# Altium PCB PCB1.PcbDoc
Units mil, origin at the board's own origin, x right, y up, seen from the top; angles counter-clockwise.
Board outline 3130 x 3175 mil, 2 copper layers (Top Layer, Bottom Layer); 30 components, 27 nets, 105 pads, 18 vias.
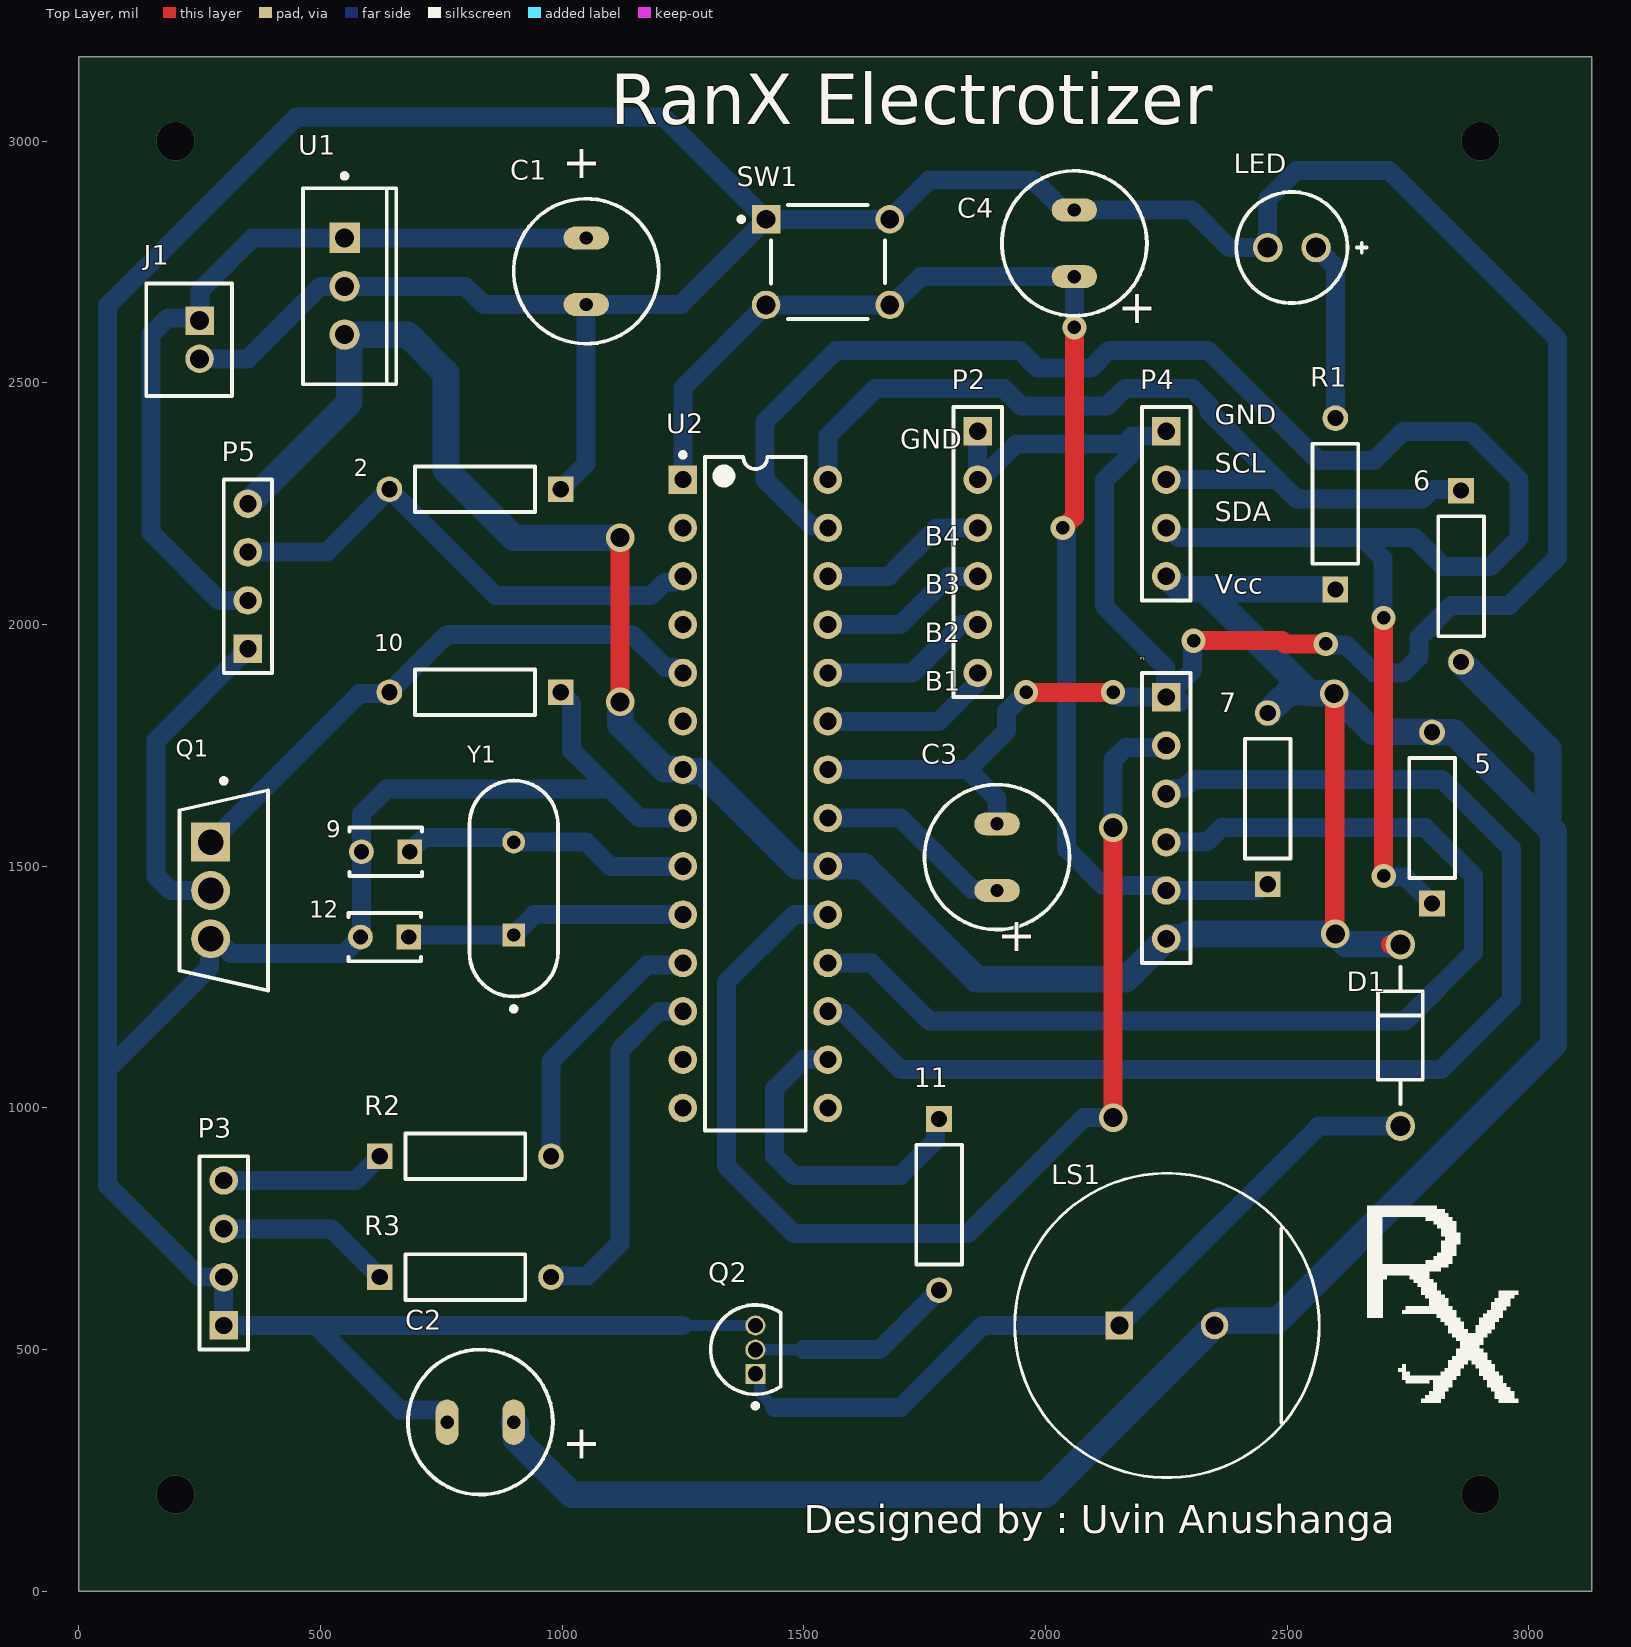
[diagram p0: Top Layer view]
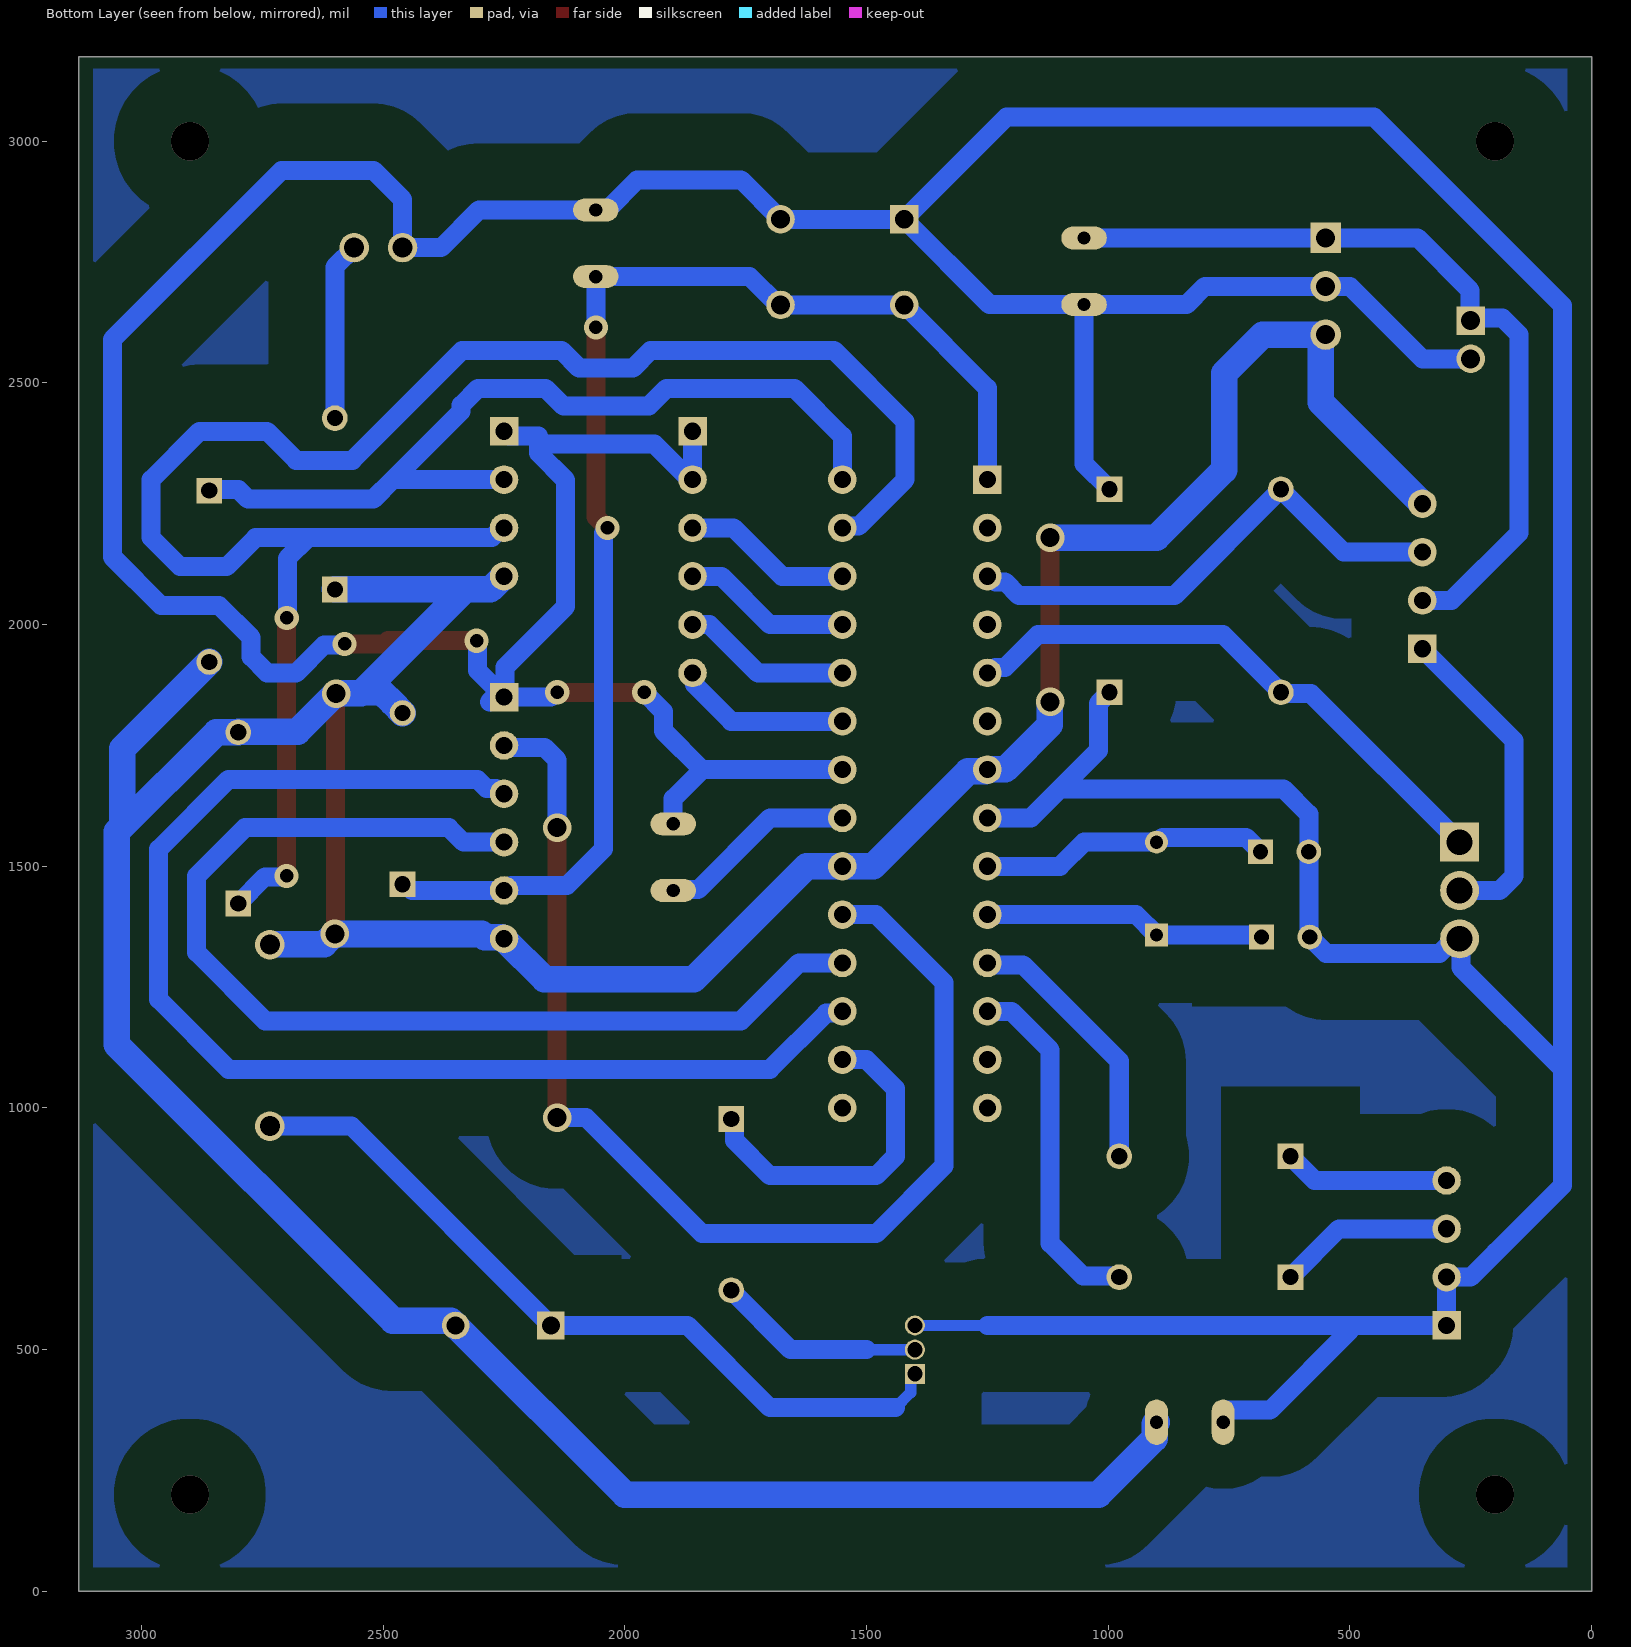
[diagram p1: Bottom Layer view, seen from below]

## Layer stack, top to bottom
Top Solder: solder mask 0.4, Solder Resist, Dk 3.5
Top Layer: signal copper 1.4
Dielectric 1: dielectric 12.6, FR-4, Dk 4.8
Bottom Layer: signal copper 1.4
Bottom Solder: solder mask 0.4, Solder Resist, Dk 3.5

## Board outline
0,0 3130,0 3130,3175 0,3175

## Design rules (kind name [scope] priority, off if disabled: settings)
Clearance [All] p1: gap=27.56 ignorepadtopadclearanceinfootprint=FALSE
PolygonConnect [All] p1: connectstyle=Relief reliefconductorwidth=10 reliefentries=4 polygonreliefangle="90 Angle" airgapwidth=10
RoutingVias [All] p1: holewidth=28 width=50 viastyle="Through Hole" minholewidth=28 minwidth=50 maxholewidth=28 maxwidth=50
SolderMaskExpansion [All] p1: expansion=4 istentingtop=FALSE
Width [All] p1: maxlimit=59.06 minlimit=31.5 preferedwidth=39.37
30 further rules are at their usual default settings.

## Components (designator, comment, footprint, x,y, rotation, side; value= is the part's Value field where it differs from the comment)
2 "220R" RESA60-630X240 820,2280 r180 top
5 "10K" RESA60-630X240 2800,1600 r90 top
6 "10K" RESA60-630X240 2860,2100 r270 top
7 "10k" RESA60-630X240 2460,1640 r90 top
9 "22pF" KEMT-C315-THT-2 635,1530 r180 top
10 "1k" RESA60-630X240 820,1860 r180 top
11 "220R" RESA60-630X240 1780,800 r270 top
12 "22pF" KEMT-C315-THT-2 632.97,1353.62 r180 top
C1 "0.33uF" "Cap NP" 1050,2800 r270 top
C2 "0.1uF" "Cap NP" 762.2,350 r0 top
C3 "0.1uF" "Cap NP" 1900,1450 r90 top
C4 "0.1uF" "Cap NP" 2060,2857.8 r270 top
D1 "1N4001" ONSC-AXIAL_LEAD-2-59-10_P 2734.62,1150 r270 top
J1 "B2B-PH-K-S(LF)(SN)" JST-B2B-PH-K-S_V 228.35,2589.37 r270 top
LED "HLMP-4740" AVAG-HLMP-4740 2510,2780 r180 top (schematic designator DS1)
LS1 "SDC1610M5-01" FP-SDC1610M5-01-MFG 2251.57,550 r0 top
P1 "Header 6" HDR1X6 2250,1850 r270 top
P2 "Header 6" HDR1X6 1860,2400 r270 top
P3 "Header 4" HDR1X4 300,550 r90 top
P4 "Header 4" HDR1X4 2250,2400 r270 top
P5 "Header 4" HDR1X4 350,1950 r90 top
Q1 "IRF530PBF" FP-X15-0364-MFG 300,1450 r0 top
Q2 "BC547B" ONSC-TO-92-3-29-11 1400,500 r90 top
R1 "220R" RESA60-630X240 2600,2250 r90 top
R2 "220R" RESA60-630X240 800,900 r0 top
R3 "220R" RESA60-630X240 800,650 r0 top
SW1 "1825910-6" TECO-1825910-6_V 1550,2750 r0 top
U1 "MC7805CTG" ONSC-TO-220-3-221AB-01 550,2700 r0 top
U2 "ATmega328-PU" 28P3 1400,1650 r0 top
Y1 "16MHz Crystal" FOX-FOXSLF080-20 900,1453.94 r90 top

## Footprints (in the part's own frame and the unit in brackets; to place one, negate y for a bottom-side part, rotate by r counter-clockwise, add the part's x,y. Pads: shape width x height; smd on the part's side, far side on the other; paste and mask are expansions set on the pad)
28P3 [mm] "28-Pin Plastic Dual In-Line Package (PDIP)"
  rect 1.5x1.5 hole 0.9: 1(-3.81,16.51)
  round 1.5 hole 0.9: 2(-3.81,13.97) 3(-3.81,11.43) 4(-3.81,8.89) 5(-3.81,6.35) 6(-3.81,3.81) 7(-3.81,1.27) 8(-3.81,-1.27) 9(-3.81,-3.81) 10(-3.81,-6.35) 11(-3.81,-8.89) 12(-3.81,-11.43) 13(-3.81,-13.97) 14(-3.81,-16.51) 15(3.81,-16.51) 16(3.81,-13.97) 17(3.81,-11.43) 18(3.81,-8.89) 19(3.81,-6.35) 20(3.81,-3.81) 21(3.81,-1.27) 22(3.81,1.27) 23(3.81,3.81) 24(3.81,6.35) 25(3.81,8.89) 26(3.81,11.43) 27(3.81,13.97) 28(3.81,16.51)
  silkscreen extent -3.93,-17.7 2.65,17.93, body extent -3.6,-17.65 3.6,17.65, height 4.58
AVAG-HLMP-4740 [mm] "THD, 2-Leads, Dia 5.845mm, Pitch 2.54mm"
  round 1.55 hole 1.05: 1(-1.27,0) 2(1.27,0)
  silkscreen extent -3.92,-2.92 2.92,2.92
"Cap NP" [mm]
  oval 1.2x2.388 hole 0.7: 1(0,0) 2(3.5,0)
  silkscreen extent -2.06,-3.81 5.56,3.81, body extent -2.2,-4 5.8,4, height 12
FOX-FOXSLF080-20 [mm] "THD, 2-Leads, Body 11.35x4.65mm"
  rect 1.2x1.2 hole 0.7: 1(-2.44,0)
  round 1.2 hole 0.7: 2(2.44,0)
  silkscreen extent -6.45,-2.33 5.67,2.33, body extent -5.68,-2.33 5.68,2.33, height 3.6
FP-SDC1610M5-01-MFG [mm]
  rect 1.45x1.45 hole 0.95 paste-1000 mask+0: 1(-2.5,0)
  round 1.45 hole 0.95 paste-1000 mask+0: 2(2.5,0)
  silkscreen extent -8,-8 8,8, body extent -8.1,-8.1 8.1,8.1, height 0.25
FP-X15-0364-MFG [mm]
  rect 2.05x2.05 hole 1.35 paste-1000 mask+0: 1(-0.685,2.54)
  round 2.05 hole 1.35 paste-1000 mask+0: 2(-0.685,0) 3(-0.685,-2.54)
  silkscreen extent -2.33,-5.26 2.33,5.88, body extent -2.42,-5.36 2.42,5.36, height 0.25
HDR1X4 [mm] "Connector; Header; 4 Position"
  rect 1.5x1.5 hole 0.9: 1(0,0)
  round 1.5 hole 0.9: 2(2.54,0) 3(5.08,0) 4(7.62,0)
  silkscreen extent -1.27,-1.27 8.89,1.27
HDR1X6 [mm] "Connector; Header; 6 Position"
  rect 1.5x1.5 hole 0.9: 1(0,0)
  round 1.5 hole 0.9: 2(2.54,0) 3(5.08,0) 4(7.62,0) 5(10.16,0) 6(12.7,0)
  silkscreen extent -1.27,-1.27 13.97,1.27
JST-B2B-PH-K-S_V [mm] "Connector, 2-Leads, Body 5.9x4.5mm, Pitch 2mm"
  rect 1.5x1.5 hole 1: 1(-1,0.55)
  round 1.5 hole 1: 2(1,0.55)
  silkscreen extent -2.95,-2.25 2.95,2.25, body extent -2.95,-2.25 2.95,2.25, height 6
KEMT-C315-THT-2 [mm] "THD, 2-Leads, Body 3.81x2.54mm"
  rect 1.3x1.3 hole 0.8: 1(-1.27,0)
  round 1.3 hole 0.8: 2(1.27,0)
  silkscreen extent -1.91,-1.27 1.91,1.27, body extent -1.91,-1.27 1.91,1.27, height 4.66
ONSC-AXIAL_LEAD-2-59-10_P [mm] "AXIAL, 2-Leads, Diameter 2.35mm"
  round 1.55 hole 1.05: 1(-4.77,0) 2(4.77,0)
  silkscreen extent -3.6,-1.18 3.6,1.17
ONSC-TO-92-3-29-11 [mm] "TO, 3-Leads, Body Dia 4.7mm, Pitch 1.27mm"
  rect 1.05x1.05 hole 0.8: 1(-1.27,0)
  round 1.05 hole 0.8: 2(0,0) 3(1.27,0)
  silkscreen extent -3.07,-1.34 2.35,2.35, body extent -2.35,-1.33 2.36,2.36, height 7.87
ONSC-TO-220-3-221AB-01 [mm] "FM, 3-Leads, Body 10.3x4.85mm, Pitch 2.54mm"
  rect 1.6x1.6 hole 1: 1(0,2.54)
  round 1.6 hole 1: 2(0,0) 3(0,-2.54)
  silkscreen extent -2.19,-5.15 2.72,5.92, body extent -2.16,-5.15 2.69,5.15, height 19.68
RESA60-630X240 [mm] "Axial Resistor, 2-Leads, Dia 2.4mm, Body Length 6.3mm"
  rect 1.35x1.35 hole 0.85: 1(-4.5,0)
  round 1.35 hole 0.85: 2(4.5,0)
  silkscreen extent -3.15,-1.2 3.15,1.2, body extent -3.15,-1.2 3.15,1.2, height 2.4
TECO-1825910-6_V [mm] "Switch, 4-Leads, Body 5.99x5.99mm"
  rect 1.5x1.5 hole 0.99: 1(-3.25,2.25)
  round 1.5 hole 0.99: 2(3.25,2.25) 3(-3.25,-2.25) 4(3.25,-2.25)
  silkscreen extent -4.67,-3 3,3, body extent -3,-2.99 2.99,3, height 5

## Part data
2 5 6 7 10 11 R1 R2 R3: library part CMP-1659-00073-1, "Axial Resistor, 100 KOhm, +/- 1%, 0.25 W, -55 to 155 degC, 2-Pin THD, RoHS, Bulk", Case\Package=Axial, Max Operating Temperature="155 degC", Min Operating Temperature="-55 degC", Package Quantity=200, Power Rating="250 mW", Resistance="475 Ohm", Tolerance=1%, Voltage Rating="250 V", ComponentLink1Description="Manufacturer URL", ComponentLink1URL=http://www.yageo.com/, ComponentLink2Description=Datasheet, ComponentLink2URL=http://www.yageo.com/documents/recent/Yageo%20LR_MFR_2013.pdf, DatasheetVersion=Apr-13, Length="0.248 inch", Mount="Through Hole", PackageDescription="2-Pin Axial Lead, Dia 2.4 mm, Body Length 6.3 mm", PackageReference=MFR-25, Packaging=Bulk, RoHSCompliant=true
9 12: library part CMP-1664-00008-1, "Capacitor, Ceramic, 22 pF, +/-10 %, 100 V, -55 to 125 degC, 2-Pin THD, RoHS, Bulk", Case\Package=TO-220, Max Input Voltage="40 V", Max Operating Temperature="125 degC", Max Ouput Current="1.5 A", Min Input Voltage="4.2 V", Min Operating Temperature="0 degC", Output Voltage="1.2 V", Package Quantity=50, ComponentLink1Description="Manufacturer URL", ComponentLink1URL=http://www.kemet.com/, ComponentLink2Description=Datasheet, ComponentLink2URL=http://capacitoredge.kemet.com/capedge2/DataSheet/Datasheet-C315C220K1G5TA.pdf?pn=C315C220K1G5TA{BULK}, DatasheetVersion=Aug-16, Height="9.28 mm", Length="10.28 mm", Mount="Through Hole", Output Current="1.5 A", Outputs=1, PackageDescription="2-Pin Through Hole Device, Body 3.81 x 2.54 mm", PackageReference=C315-THT-2, Packaging=Rail/Tube, Pins=3, Radiation Hardening=No, REACH SVHC="No SVHC", RoHSCompliant=true, Weight="0.08113 oz", Width="4.82 mm"
C1 C2 C3 C4: library part Cap_NP
D1: library part CMP-0902-00117-1, "Standard Recovery Rectifier, 2-Pin Axial_Lead, Pb-Free, Bulk Bag", Manufacturer="On Semiconductor", ComponentLink1Description="Manufacturer URL", ComponentLink1URL=http://www.onsemi.com/, ComponentLink2Description=Datasheet, ComponentLink2URL=http://www.onsemi.com/pub_link/Collateral/1N4001-D.PDF, ComponentLink3Description="Package Specification", ComponentLink3URL=http://www.onsemi.cn/pub_link/Collateral/59-10.PDF, DatasheetVersion="Rev. 13", IFSM Max (A)=30, IO(rec) Max (A)=1, Mounting Technology="Through Hole", PackageDescription="2-Pin, Axial Lead, Diameter 2.35 mm", PackageReference=AXIAL_LEAD-2-59-10, PackageVersion="Rev. U, 02/2005", Packing="Bulk Bag", PartNumber=1N4001, RoHS=TRUE, Type="Standard Recovery", VRRM Max (V)=50
J1: library part CMP-2000-05162-1, "Male Header, Pitch 2 mm, 1 x 2 Position, Height 6 mm, Tail Length 3.4 mm, -25 to 85 degC, RoHS, Bulk", Manufacturer=JST, Datasheet URL=http://datasheet.octopart.com/B2B-PH-K-S%28LF%29%28SN%29-JST-datasheet-8324864.pdf, Datasheet Version=Nov-08, Manufacturer URL=http://www.jst.com/home2.html, No of Positions=2, Pitch=2mm, Style/Orientation=StraightHeader/Plug, Termination=Crimp, Type=ShroudedHeader
LED: library part CMP-2000-06413-1, "T-1 3/4 (5 mm) Low Current LED Lamp, Green, 1.9 V, -20 to 100 degC, 2-Pin THD, RoHS, Bulk", Color=Green, Dominant Wavelength/Color Temperature=569nm, Manufacturer=AvagoTechnologies, Package=2T-13/4, Package Description="2-Pin Through Hole Device, Dia 5.845 mm, Pitch 2.54 mm", Category=LEDs, Datasheet URL=http://docs.avagotech.com/docs/AV02-1557EN, Datasheet Version=07/2014, Intensity=2.3mcd, Lens Appearance=ColoredDiffused, Lens Shape Type=Circular, Manufacturer URL=http://www.avagotech.com/, Mounting=ThroughHole, Mounting Orientation=TopMount, Mounting Technology=ThroughHole, Number of LEDs=1, Package Reference=HLMP-4740, Packaging=Bulk, Peak Wavelength=565nm, Pin Count=2, Rad Hard=No, Type=Uni-Color, Viewing Angle=50°
LS1: library part CMP-08413-000008-1, "AUDIO MAGNETIC INDICATOR 4-8V TH", Frequency=2.4kHz, Max Operating Temperature=70°C, Max Supply Current=30mA, Min Operating Temperature=-10°C, Nominal Supply Voltage (DC)=5V, Diameter=16mm, Height=10mm, Input Type=DC, Lead Free="Lead Free", Mount="Through Hole", Number of Pins=2, Number of Terminals/Pins=2, Operating Supply Current=30mA, Packaging=Tray, Sensing Method=Magnetic, Series=SDC, Termination="PC Pins", Voltage Rating=5V
P1 P2: "Header, 6-Pin", LatestRevisionDate=17-Jul-2002, LatestRevisionNote="Re-released for DXP Platform.", Publisher="Altium Limited"
P3 P4 P5: "Header, 4-Pin", LatestRevisionDate=17-Jul-2002, LatestRevisionNote="Re-released for DXP Platform.", Publisher="Altium Limited"
Q1: library part CMP-02550-000190-1, "MOSFET N-CH 100V 14A TO-220AB", Continuous Drain Current=14A, Drain To Source Breakdown Voltage=100V, Drain To Source Resistance=0.16Ω, Gate To Source Voltage=20V, Input Capacitace At Vds="670pF @ 25V", Manufacturer=Vishay, Max Forward Diode Voltage=2.5V, Max Junction Temp=+175°C, Package=X15-0364, Power Dissipation=88W, Pulse Drain Current=56A, Temperature="-55°C to +175°C", Temperature Range Low=-55°C, Automotive=No, Category=Trans, ComponentLink2Description=Datasheet, ComponentLink2URL=http://www.vishay.com/docs/91019/91019.pdf, Depletion Mode=False, Device Class L1="Discrete Semiconductors", Device Class L2=Transistors, Device Class L3=MOSFETs, Digikey Description="MOSFET N-CH 100V 14A TO-220AB", Drain To Source Voltage=100V, Gate Charge At Vgs="26nC @ 10V", Height=19.89mm, Lead Free=Yes, Manufacturer Part Number=IRF530PBF, Mouser Description="MOSFET N-Chan 100V 14 Amp", Number Of Channels=1, Number Of N Channels=1, Octopart=https://octopart.com/irf530pbf-vishay-46547999, Reverse Recovery Charge=850nC, Reverse Recovery Time=150ns, RoHS=TRUE, Rthja Max=62°C/W, Standoff Height=3.33mm, Temperature Range High=+175°C, Threshold Vgs Max=4V, Threshold Vgs Min=2V, Turn Off Delay Time=23ns, Turn On Delay Time=10ns
Q2: library part CMP-1048-01467-1, "Amplifier Transistor, NPN Silicon, 3-Pin TO-92, Bulk Box", Manufacturer="On Semiconductor", ComponentLink1Description="Manufacturer URL", ComponentLink1URL=http://www.onsemi.com/, ComponentLink2Description=Datasheet, ComponentLink2URL=http://www.onsemi.com/pub_link/Collateral/BC546-D.PDF, ComponentLink3Description="Package Specification", ComponentLink3URL=http://www.onsemi.cn/pub_link/Collateral/2N6426-D.PDF, DatasheetVersion="Rev. 7", fT Min (MHz)=150, IC Continuous (A)=0.1, Mounting Technology="Through Hole", PackageDescription="3-Pin Transistor Outline, Body 4.825 x 3.685 mm, Pitch 1.27 mm", PackageReference=TO-92-3-29-11_AM_SL, PackageVersion="Rev. AM", Packing="Bulk Box", PartNumber=BC547B, Polarity=NPN, RoHS=FALSE
SW1: library part CMP-1684-00021-1, "Tact Switch, SPST-NO, 0.05 A, -35 to 85 degC, 4-Pin THD, RoHS, Bulk", Actuator Color=Black, Contact Rating @ Voltage=0.05A@24VDC, Dielectric Strength=500VAC, Manufacturer="TE Connectivity", Maximum AC Voltage Rating=N/A, Maximum Contact Resistance=100mOhm, Maximum DC Voltage Rating=24V, Minimum Insulation Resistance=100MOhm, Operating Temperature=-35to85C, Package Description="4-Pin Through Hole Device, Body 5.99 x 5.99 mm, Pitch 6.5 mm", Package Reference=THD, Actuator Length=1.4mm, Actuator Material=PolybutyleneTerephthalate, Actuator Style=RoundButton, Base Material=N/A, Body Orientation=Straight, Bushing Type=Unthreaded, Contact Material=CopperAlloy, Contact Plating=Silver, Datasheet URL=http://www.te.com/commerce/DocumentDelivery/DDEController?Action=showdoc&DocId=Customer+Drawing%7F1825910%7FC9%7Fpdf%7FEnglish%7FENG_CD_1825910_C9.pdf%7F1825910-6, Datasheet Version="Rev. C9", Dimension=5.99x5mm, Electrical Life=100000Cycles, Family=1825910, Function=MomentaryContact, Housing Material=N/A, Illumination=N/R, Manufacturer URL=http://www.te.com, Mechanical Life=100000Cycles, Mounting=ThroughHole, Packaging=N/A, Part No=1825910-6, Pole Throw Configuration=SPST, Product Weight=N/A, RoHS=Yes, Seal Description=N/A, Seal Location=N/A, Switch Configuration=OFF(ON), Terminal Type=PCPins, Thread Size=N/R
U1: library part CMP-2000-04928-1, "Positive Voltage Regulator, 1 A, 5 V, 0 to 125 degC, 3-Pin TO-220, RoHS, Tube", Current, Output, Maximum=1A, Current, Quiescent Supply=6.5mA, Current, Supply=3.2mA, Dropout Voltage=2V, Manufacturer="ON Semiconductor", Package Description="3-Pin Flange Mount, Vertical Straight Lead, Body 9.97 x 4.445 mm, Pitch 2.54 mm", Package Reference=TO-220-3-221AB-01, Package Type=TO-220, Package Version="Rev. A, 11/2010", Resistance, Thermal, Junction to Case=5degC/W, Temperature, Operating, Maximum=+125degC, Temperature, Operating, Minimum=0degC, Temperature, Operating, Range=0to+125degC, Voltage, Input Range=Maximumof35V, Voltage, Input, High Level=35V, Voltage, Noise=10μV/V, Voltage, Output=5V, Datasheet URL=http://www.onsemi.com/pub_link/Collateral/MC7800-D.PDF, Datasheet Version="Rev. 27, 11/2014", Dimensions=10.28x4.82x15.75mm, Dropout Voltage Measurement Current=1A, Height=15.75mm, Length=10.28mm, Line Regulation=20mV, Load Regulation=25mV, Manufacturer URL=http://www.onsemi.com/, Mounting Type=ThroughHole, Number of Outputs=1, Number of Pins=3, Output Type=Fixed, Polarity=Positive, Regulation, Line=0.5mV, Regulation, Load=1.3mV, Regulator Function=Standard, Regulator Type=PositiveVoltageOut, Type=VoltageRegulator, Voltage, Dropout=2V, Voltage, Supply=35V, Width=4.82mm
U2: library part CMP-0095-00015-2, "8-bit AVR Microcontroller, 32KB Flash, 1KB EEPROM, 2KB SRAM, 28-pin PDIP, Industrial Grade (-40°C to 85°C)", ComponentLink1Description="Manufacturer URL", ComponentLink1URL=http://www.atmel.com/, ComponentLink2Description="ATmega48A/48PA/88A/88PA/168A/168PA/328/328P Datasheet", ComponentLink2URL=http://www.atmel.com/dyn/resources/prod_documents/8271.pdf, ComponentLink3Description="ATmega48A/48PA/88A/88PA/168A/168PA/328/328P Summary", ComponentLink3URL=http://www.atmel.com/dyn/resources/prod_documents/8271S.pdf, DatasheetVersion="revD, May-2011", PackageDescription="28-lead (0.300\"/7.62mm Wide) Plastic Dual Inline Package (PDIP)", PackageReference=28P3, PackageVersion="revB, Sep-2001", RevisionNote="DatasheetVersion updated. URLs added."
Y1: library part CMP-003-00025-2, "Resistance Weld Thru-Hole Crystal, 8 MHz, +/- 50 ppm, 10 pF, -20 to 70 degC, 2-Pin THD, RoHS, Bulk", Case/Package=FOXSLF080-20, Frequency=8MHz, Frequency Tolerance=30ppm, Load Capacitance=20pF, Manufacturer="FOX Electronics", Max Operating Temperature=70°C, Min Operating Temperature=-20°C, Package Description="2-Pin Through Hole Device, Body 11.35 x 4.65 mm", Package Quantity=100, Resistance=80Ohm, Tolerance=50ppm, Datasheet URL=http://download.siliconexpert.com/pdfs/2015/4/5/6/5/7/200/fox_/manual/35607121449963728hc49slf.pdf, Datasheet Version=Mar-15, ESR=80, Manufacturer URL=http://www.foxonline.com/, Mounting Technology=TH, Package Reference=FOXSLF080-20, Packaging=Bulk, Pins=2, RoHS Compliant=True

## Via types
v1: diameter 50, hole 28, Top Layer to Bottom Layer, 8 vias
v2: diameter 59.06, hole 39.37, Top Layer to Bottom Layer, 6 vias
v3: diameter 78.74, hole 78.74, Top Layer to Bottom Layer, 4 vias

## Nets (pads, with @x,y where several pads share a name; then routed paths per layer and width w, separated by ;. In a path a pad name is that pad's centre, name@x,y a point inside that pad or via, vN(x,y) a via of type N, cw(c..) or ccw(c..) an arc to the next point about the centre after c; other vN are vias at no path point)
+5: 5.2 6.2 7.2 C2.2 D1.1 LS1.2 P1.6 P4.4 P5.4 R1.1 U1.3 U2.7 U2.20 | length 8948.6
  Top Layer w39.37: v2(1120,1840) v2(1120,2180) ; v2(2597.36,1857.36) 2598.68,1856.04 2598.68,1361.32 v2(2600,1360) ; D1.1@2714,1337.8 D1.1
  Bottom Layer w39.37: U1.3 554.52,2595.48 554.52,2578.78 U1.3@560,2573.3
  Bottom Layer w55.12: P5.4 560,2460 U1.3@560,2573.3 ; U1.3 680,2600 760,2520 760,2320 900,2180 v2(1120,2180) ; C2.2 903.94,346.06 903.94,316.06 1020,200 2000,200 LS1.2 2350.53,550 2360.53,560 2480,560 3051.35,1131.35 3051.35,1571.14 2845.32,1777.17 2842.83,1777.17 5.2 2798.51,1778.66 2677.13,1778.66 2598.43,1857.36 v2(2597.36,1857.36) 2596.61,1858.12 2545.35,1858.12 ; v2(1120,1840) 1120.75,1839.25 1120.75,1792.84 1212.84,1700.75 1249.25,1700.75 U2.7 1251.07,1700 1254.61,1696.46 1289.95,1696.46 1486.41,1500 U2.20 1624,1500 1857.39,1266.61 2166.61,1266.61 P1.6 2251.07,1350 2254.61,1353.54 2289.95,1353.54 2296.41,1360 2601.07,1360 2622.14,1338.93 2733.49,1338.93 D1.1 ; P4.4 2251.07,2100 2278.23,2072.83 2330.63,2072.83 ; 7.2 2481.22,1838.38 2502.83,1860 2543.46,1860 2545.35,1858.12 ; R1.1 2330.63,2072.83 ; 6.2 3040,1742.83 3040,1600 3031.25,1591.25 ; 2330.63,2072.83 2545.35,1858.12
BTN1: P2.6 U2.23 | length 363.1
  Bottom Layer w39.37: U2.23 1780,1800 1856.23,1876.23 1856.23,1896.23 P2.6
BTN2: P2.5 U2.24 | length 351.4
  Bottom Layer w39.37: U2.24 1725,1900 1825,2000 P2.5
BTN3: P2.4 U2.25 | length 351.4
  Bottom Layer w39.37: U2.25 1700,2000 1800,2100 P2.4
BTN4: P2.3 U2.26 | length 331.4
  Bottom Layer w39.37: U2.26 1675,2100 1775,2200 P2.3@1840,2200
BUZ: 11.1 U2.16 | length 701.7
  Bottom Layer w39.37: U2.16 1500,1100 1440,1040 1440,900 1480,860 1700,860 1773.11,933.11 1773.11,970.28 11.1
Cswt-: 2.2 P5.3 U2.3 | length 1061.5
  Bottom Layer w39.37: P5.3 512.83,2150 2.2 862.83,2060 1184.73,2060 1213.31,2088.58 1233.26,2088.58 1244.67,2100 U2.3
GND: 2.1 9.2 10.1 12.2 C1.2 C2.1 C3.2 C4.1 J1.2 LED.2 P1.1 P2.1 P2.2 P3.1 P3.2 P4.1 Q1.3 Q2.3 SW1.1 SW1.2 U1.2 U2.8 U2.22 | length 14512.3
  Top Layer w39.37: C1.2@1027.17,2662.2 C1.2 ; v1(1960,1860) v1(2140,1860) ; v1(2306.73,1966.73) 2489.53,1966.73 2495.94,1960.31 v1@2579.69,1960.31
  Bottom Layer w23.62: 1250,550 Q2.3
  Bottom Layer w39.37: 60,840 60,1080 ; 60,1140 60,1080 ; 60,1143.94 60,2660 450,3050 1210.63,3050 SW1.1 ; 62.78,837.22 198.44,701.56 250,650 P3.2 P3.1 1250,550 ; J1.2 350,2550 500,2700 U1.2 800,2700 837.8,2662.2 C1.2 ; Q1.3@270.59,1347.56 270.59,1290.59 60,1080 ; Q1.3 284.22,1350 314.22,1320 549.35,1320 12.2 ; 499.84,540.16 665.12,374.88 758.57,374.88 762.2,371.25 C2.1 ; 12.2@585,1360 9.2 585,1608 637,1660 1100,1660 ; 10.1 1020,1837.17 1020,1740 1100,1660 ; 2.1 1050,2332.83 C1.2 ; U2.8 1160,1600 1100,1660 ; U2.22 1840,1700 ; P2.1@1860,2398.08 P2.2 1865.33,2300 1938.79,2373.47 2178.38,2373.47 ; C3.2 1900,1640 1840,1700 ; v1(1960,1860) 1920,1820 1920,1780 1840,1700 ; v1(2140,1860) 2142.88,1860 2152.88,1850 P1.1 ; P1.1@2248.08,1851.92 2248.08,1911.92 2122.8,2037.2 2122.8,2299.3 2178.38,2354.88 2178.38,2390.16 2240.16,2390.16 P4.1 ; P1.1@2259.84,1859.84 2304.69,1904.69 2304.69,1964.69 v1(2306.73,1966.73) ; P1.1@2260.16,1859.84 2280,1840 ; v1(2580,1960) 2582.03,1957.97 2622.03,1957.97 2680,1900 2740,1900 2773.39,1933.39 2773.39,1973.39 2840,2040 2960,2040 3060,2140 3060,2590 2710,2940 2520,2940 2460,2880 LED.2 2380,2780 2302.2,2857.8 C4.1 2036.62,2857.8 1974.42,2920 1759.37,2920 SW1.2 SW1.1 ; C1.2 1245.67,2662.2 SW1.1
LED1: R2.2 U2.11 | length 554
  Bottom Layer w39.37: R2.2 977.17,1097.17 1176.23,1296.23 1246.23,1296.23 U2.11
LED2: R3.2 U2.12 | length 735
  Bottom Layer w39.37: R3.2 979.8,652.64 1052.64,652.64 1120,720 1120,1120 1200,1200 U2.12
"Load Drive": 10.2 Q1.1 U2.5 | length 1188.2
  Bottom Layer w39.37: Q1.1 580.4,1857.36 640.2,1857.36 10.2 762.84,1980 1144.73,1980 1213.31,1911.42 1233.26,1911.42 1244.67,1900 U2.5
Load+: C1.1 J1.1 P5.2 U1.1 | length 1689.7
  Bottom Layer w39.37: J1.1 244.26,2634.48 184.48,2634.48 150,2600 150,2190 290,2050 P5.2 ; J1.1@251.29,2630.03 251.29,2691.29 360,2800 U1.1 C1.1
Load-: P5.1 Q1.2 | length 674.2
  Bottom Layer w39.37: Q1.2 190,1450 160,1480 160,1760 P5.1
MISO: P1.4 U2.18 | length 2292.4
  Bottom Layer w39.37: U2.18 1640,1300 1760,1180 2744,1180 2886,1322 2886,1480 2786,1580 2364,1580 2334,1550 P1.4
MOSI: P1.3 U2.17 | length 2622
  Bottom Layer w39.37: U2.17 1553.77,1196.23 1583.77,1196.23 1700,1080 2820,1080 2964.74,1224.74 2964.74,1535.26 2820,1680 2305.27,1680 2286.69,1661.42 2266.74,1661.42 2255.33,1650 P1.3
Net9_1: 9.1 U2.9 Y1.2 | length 604.4
  Bottom Layer w39.37: 9.1 715,1560 887.87,1560 Y1.2@897.87,1550 ; Y1.2 Y1.2@897.87,1550 ; U2.9 1100,1500 1050,1550 Y1.2@897.87,1550
Net11_2: 11.2 Q2.2 | length 430.9
  Bottom Layer w23.62: Q2.2 1500,500
  Bottom Layer w39.37: 1500,500 1657.23,500 11.2 11.2
Net12_1: 12.1 U2.10 Y1.1 | length 589.9
  Bottom Layer w39.37: 12.1@683.96,1351.5 683.96,1357.87 Y1.1 942.13,1400 U2.10
NetC3_1: C3.1 U2.21 | length 412.1
  Bottom Layer w39.37: U2.21 1700,1600 1848.49,1451.51 1898.49,1451.51 C3.1
NetD1_2: D1.2 LS1.1 Q2.1 | length 1622.3
  Bottom Layer w23.62: Q2.1 1408.86,441.14 1408.86,411.14 1440,380
  Bottom Layer w39.37: 1440,380 1700,380 1870,550 LS1.1 2565.35,962.2 D1.2
NetDS1_1: LED.1 R1.2 | length 365.7
  Bottom Layer w39.37: LED.1 2600,2740 R1.2@2600,2430.89
NetP3_3: P3.3 R3.1 | length 364.3
  Bottom Layer w39.37: P3.3 522.83,750 R3.1
NetP3_4: P3.4 R2.1 | length 343.5
  Bottom Layer w39.37: P3.4 572.83,850 R2.1
RST: 7.1 C4.2 P1.5 SW1.3 SW1.4 U2.1 | length 2724.5
  Top Layer w39.37: v1(2035.94,2200) 2037.12,2200 2060,2222.88 v1(2060,2615)
  Bottom Layer w39.37: U2.1 1250,2489.37 SW1.3 SW1.4 1683.28,2661.42 1741.86,2720 C4.2 v1(2060,2615) ; v1(2035.94,2200) 2035.94,2197.12 2044.06,2189.01 2044.06,1535.94 2120,1460 2234.67,1460 2244.67,1450 7.1@2440,1450
SCK: P1.2 U2.19 | length 2467.8
  Top Layer w39.37: v2(2140,980) v2(2140,1580)
  Bottom Layer w39.37: U2.19 1480,1400 1340,1260 1340,880 1480,740 1840,740 2080,980 v2(2140,980) ; v2(2140,1580) 2140,1720 2166.23,1746.23 2246.23,1746.23 P1.2
SCL: 6.1 P4.2 U2.28 | length 1810.8
  Bottom Layer w39.37: U2.28 1550,2390 1648.58,2488.58 1913.99,2488.58 1950.37,2452.21 2127.43,2452.21 2163.81,2488.58 2303.99,2488.58 2338.58,2453.99 2338.58,2441.42 2480,2300 ; P4.2 2480,2300 ; 6.1@2859.62,2279.62 2799.62,2279.62 2780,2260 2520,2260 2480,2300
SDA: 5.1 P4.3 U2.27 | length 3853.1
  Top Layer w39.37: v1(2699.71,2013.84) 2699.85,2013.69 2699.85,1480.15 v1(2700,1480)
  Bottom Layer w39.37: U2.27 1546.23,2203.77 1516.23,2203.77 1420,2300 1420,2420 1567.32,2567.32 1946.6,2567.32 1982.98,2530.95 2094.82,2530.95 2131.19,2567.32 2336.6,2567.32 2563.93,2340 2680,2340 2740,2400 2880,2400 2980,2300 2980,2180 2920,2120 2823.74,2120 2763.74,2180 2655.62,2180 ; P4.3 2255.33,2200 2275.33,2180 2655.62,2180 ; v1(2699.71,2013.84) 2698.36,2015.18 2698.36,2137.25 2655.62,2180 ; v1(2700,1480) 2702.03,1477.97 2744.87,1477.97 5.1
pads on no net: U2.2 U2.4 U2.6 U2.13 U2.14 U2.15
copper on no net:
  other v3: 200,200 2900,200 200,3000 2900,3000

## Polygon pours and split planes (outlines as drawn)
GND on Bottom Layer "GND_L02_P013" (solid, pour order 13): 3100,3150 3100,50 50,50 50,3150

## Silkscreen, mask and mechanical layers (free items; w line width, h text height)
Top Overlay:
  region: 276 vertices and 1 holes, not listed, extent 2666,390 2978,798
  text "RanX Electrotizer" at 1100,3000 h180
  text "+" at 1000,2900 h120
  text "+" at 2150,2600 h120
  text "GND" at 2350,2400.71 h70
  text "GND" at 1700,2350.71 h70
  text "SCL" at 2350,2300.71 h70
  text "SDA" at 2350,2200.71 h70
  text "B4" at 1750,2150 h70
  text "B3" at 1750,2050.58 h70
  text "Vcc" at 2350,2050.58 h70
  text "B2" at 1750,1950 h70
  text "B1" at 1750,1850 h70
  text "+" at 1900,1300 h120
  text "+" at 1000,250 h120
  text "Designed by : Uvin Anushanga" at 1500,100 h100